# Altium PCB pcb_xl_15cm.PcbDoc
Units mm, origin at the board's own origin, x right, y up, seen from the top; angles counter-clockwise.
Board outline 29 x 150 mm, 2 copper layers (Top Layer, Bottom Layer); 40 components, 37 nets, 146 pads, 46 vias.
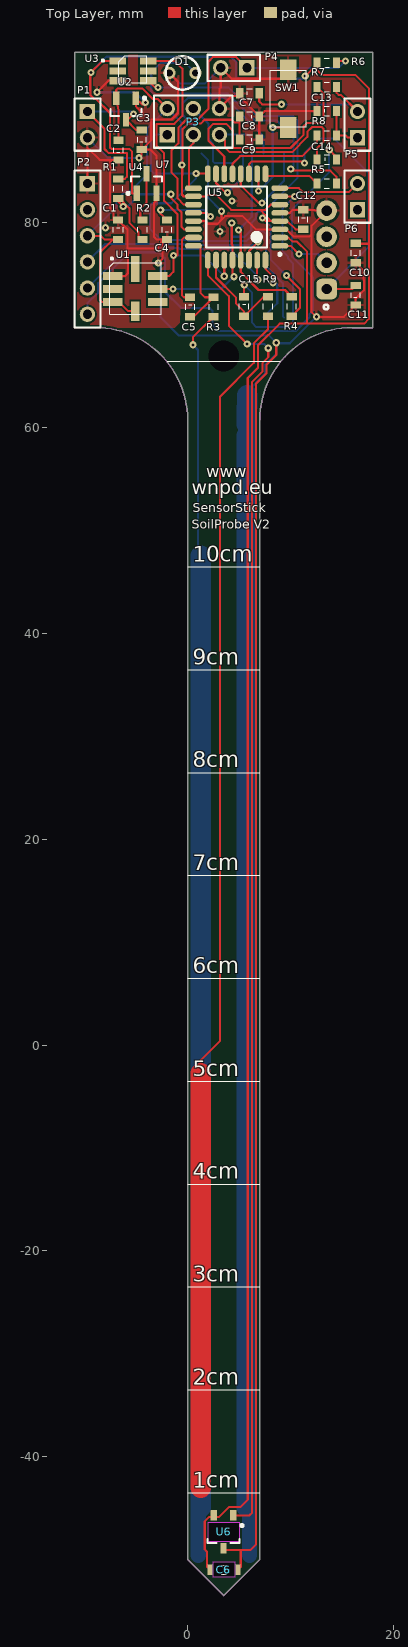
[diagram p0: Top Layer view]
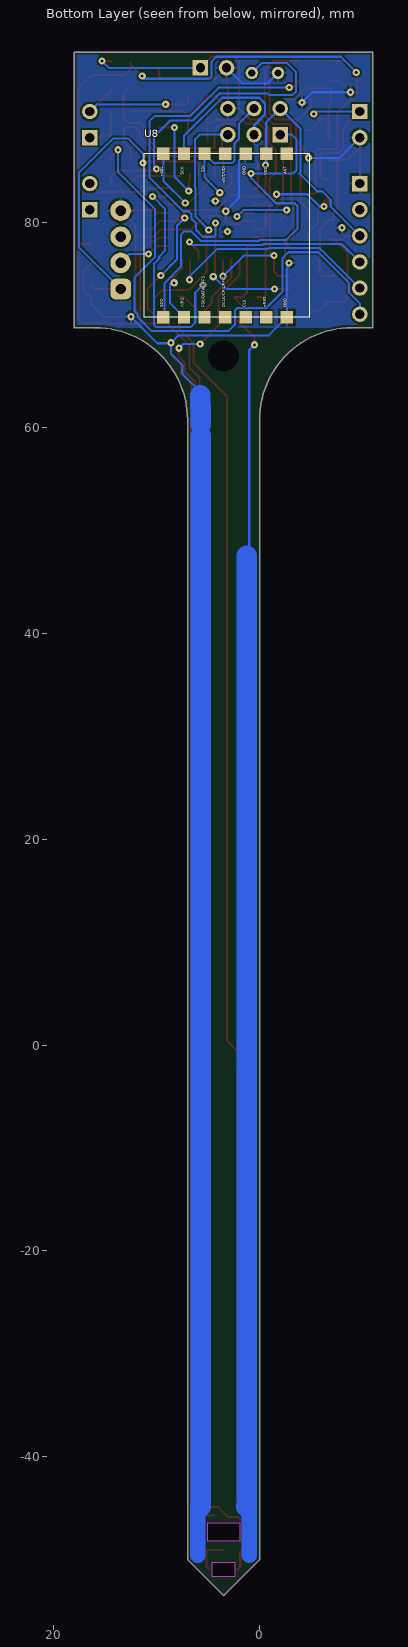
[diagram p1: Bottom Layer view, seen from below]
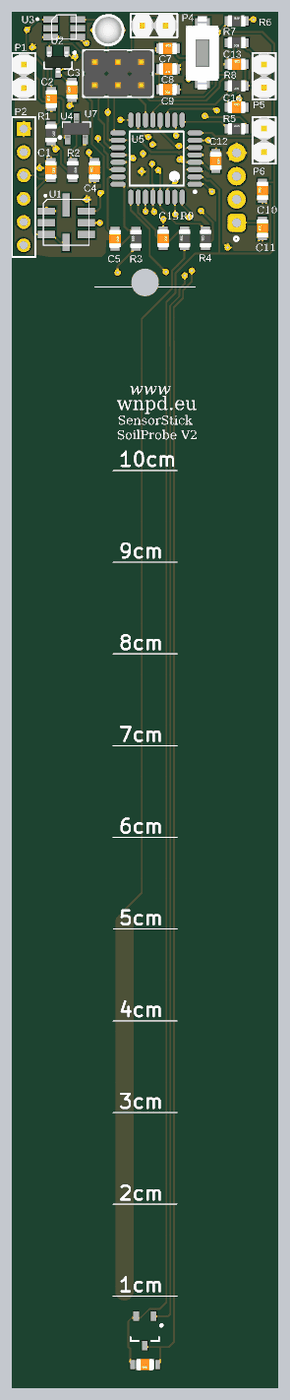
[diagram p2: 3D render of the assembled board from above, using the file's embedded part models]

## Layer stack, top to bottom
Top Layer: signal copper 0.0356
Dielectric: dielectric 0.32, FR-4, Dk 4.8
Bottom Layer: signal copper 0.0356

## Board outline
0,60.75 ccw(c-9,60.75) -9,69.75 -11,69.75 -11,96.5 18,96.5 18,69.75 16,69.75 ccw(c16,60.75) 7,60.75 7,-50 3.5,-53.5 0,-50
cut-out: 2.425,-50.275 2.425,-51.65 4.6,-51.65 4.6,-50.275
cut-out: 1.95,-46.4 1.95,-48.2 5.05,-48.2 5.05,-46.4

## Design rules (kind name [scope] priority, off if disabled: settings)
Clearance "Clearance via" [IsVia vs IsPad] p1: gap=0.5
Clearance Clearance-xPP-xTP-xTT [All] p2: gap=0.2
ComponentClearance [All] p1: gap=0.2 collisioncheckmode=3 verticalgap=0.2 showdistances=FALSE
HoleSize HoleSize-PTH [All] p1: absolutevalues=TRUE maxlimit=4 minlimit=0.25 maxpercent=80.000 minpercent=20.000
HoleToHoleClearance [All] p1: gap=0.15 allowstackedmicrovias=TRUE
Length "Schematic Length Constraint" [InNet('ANTENNA')] p1: maxlimit=164.71 minlimit=164.7
MinimumAnnularRing "Minimum IAR <=0.45mm" [((ObjectKind = 'Pad') OR (ObjectKind = 'Via')) And (Layer = 'MultiLayer') And (HoleDiameter <= AsMM(0.45))] p1: minimumring=0.175 // minimum inner annular ring for pads <= 0.45mm finished hole size
MinimumSolderMaskSliver [All] p1: minsoldermaskwidth=0.1
PolygonConnect [All] p1: connectstyle=Relief reliefconductorwidth=0.254 reliefentries=4 polygonreliefangle="90 Angle" airgapwidth=0.254
RoomDefinition SoilProbe [InComponentClass('SoilProbe')] p1: confinementstyle=ConfineIn formatcopy=TRUE lockcomponents=FALSE outline -27.8,44.75 -12,44.75 -12,49.25 -27.8,49.25
RoomDefinition SensVoltageBatt [InComponentClass('SensVoltageBatt')] p2: confinementstyle=ConfineIn formatcopy=TRUE lockcomponents=FALSE outline 48.3,75.225 61.75,75.225 61.75,82.225 48.3,82.225
RoomDefinition SensorOutput [InComponentClass('SensorOutput')] p3: confinementstyle=ConfineIn formatcopy=TRUE lockcomponents=FALSE outline 19.2,85.775 37.75,85.775 37.75,94.025 19.2,94.025
RoomDefinition SensorLDR [InComponentClass('SensorLDR')] p4: confinementstyle=ConfineIn formatcopy=TRUE lockcomponents=FALSE outline 25.95,110.25 37.7,110.25 37.7,118.5 25.95,118.5
RoomDefinition RFM12B [InComponentClass('RFM12B')] p5: confinementstyle=ConfineIn formatcopy=TRUE lockcomponents=FALSE outline 50.25,53 59.5,53 59.5,72.5 50.25,72.5
RoomDefinition Regulator3v3 [InComponentClass('Regulator3v3')] p6: confinementstyle=ConfineIn formatcopy=TRUE lockcomponents=FALSE outline 8.725,114.2 23.225,114.2 23.225,121.2 8.725,121.2
RoomDefinition ArduinoDownload [InComponentClass('ArduinoDownload')] p7: confinementstyle=ConfineIn formatcopy=TRUE lockcomponents=FALSE outline 40.75,96.42 59,96.42 59,114.92 40.75,114.92
RoutingVias "RoutingVias <= 0.45mm" [All] p1: holewidth=0.25 width=0.7 viastyle="Through Hole" minholewidth=0.25 minwidth=0.6 maxholewidth=0.5 maxwidth=1 // finishet hole size <= 0.45mm
SilkToSilkClearance [All] p1: silktosilkclearance=0.2
SilkToSolderMaskClearance SilkscreenOverComponentPads [IsPad] p1: minsilkscreentomaskgap=0.2 clearancetoexposedcopper=TRUE
SolderMaskExpansion [All] p1: expansion=0.102
Width Width-xTW [All] p1: maxlimit=4 minlimit=0.2 preferedwidth=0.2
22 further rules are at their usual default settings.

## Classes and differential pairs
component class ArduinoDownload: C14 P2
component class Regulator3v3: C2 C3 U2
component class RFM12B: C8 C9 U8
component class SensorLDR: P4 R6
component class SensorOutput: C7 C13 P5 R7 R8
component class SensVoltageBatt: R1 R2 U4
component class SoilProbe: C5 C15 R3 R9

## Components (designator, comment, footprint, x,y, rotation, side; value= is the part's Value field where it differs from the comment)
C1 "100n" C0805#1 -6.75,79.25 r270 top (schematic designator C14)
C2 "1u" C0805#1 -6.75,87 r90 top (schematic designator C10)
C3 "1u" C0805#1 -4.5,88 r90 top (schematic designator C9)
C4 "100n" C0805#1 -2.05,79.25 r90 top (schematic designator C1)
C5 "2n2" C0805#1 0.25,71.75 r270 top (schematic designator C4)
C6 "100n" C0805#2 3.5,-51 r180 top (schematic designator C15)
C7 "100n" C0805#1 6,92.54 r0 top (schematic designator C11)
C8 "10n" C0805#1 6,90.24 r180 top (schematic designator C7)
C9 "220p" C0805#1 6,88 r180 top (schematic designator C6)
C10 "100n" C0805#1 16.3,77 r90 top (schematic designator C13)
C11 "100n" C0805#1 16.3,72.9 r90 top (schematic designator C12)
C12 "100n" C0805#1 11.25,80.25 r270 top (schematic designator C2)
C13 "100n" C0805#1 13.5,90.82 r0 top (schematic designator C8)
C14 "100n" C0805#1 13.5,86.12 r0 top (schematic designator C3)
C15 "2n2" C0805#1 5.5,71.8 r270 top
D1 "LED RED" LED-3mm 0.75,94.5 r180 top
P1 "9vIN" PH1x2_2.54 -9.75,90.75 r270 top (schematic designator P6)
P2 "Arduino Download interface" PH1x6_2.54 -9.75,83.75 r270 top (schematic designator P3)
P3 "ICSP" PH2x3_2.54 -2,88.5 r0 top (schematic designator P7)
P4 "Light sensor (LDR)" PH1x2_2.54 5.75,95 r180 top (schematic designator P1)
P5 "SoilAnalogOutput" PH1x2_2.54 16.5,88.21 r90 top
P6 "Pin Header" PH1x2_2.54 16.5,81.21 r90 top (schematic designator P2)
R1 "RESISTOR" R0805 -6.75,83.25 r270 top (schematic designator R5)
R2 "RESISTOR" R0805 -4.39,79.25 r270 top (schematic designator R6)
R3 "RESISTOR" R0805 2.5,71.75 r90 top (schematic designator R4)
R4 "RESISTOR" R0805 10.1,71.8 r90 top (schematic designator R2)
R5 "RESISTOR" R0805 13.5,83.75 r0 top (schematic designator R1)
R6 "RESISTOR" R0805 13.5,95.5 r0 top (schematic designator R3)
R7 "RESISTOR" R0805 13.5,93.13 r180 top (schematic designator R8)
R8 "RESISTOR" R0805 13.5,88.43 r180 top (schematic designator R7)
R9 "RESISTOR" R0805 7.8,71.8 r90 top
SW1 "Tact. SMT" "Switch TACT 3.5*6" 9.75,87.5 r180 top
U1 "Barometric sensor" BMP085 -5,73.75 r0 top (schematic designator U2)
U2 "MCP1703T" SOT23 -6,91 r270 top (schematic designator U8)
U3 "Luminosity sensor" TSL2561 -4.2,94.725 r0 top (schematic designator U5)
U4 "NMOS FDV303N" SOT-23-FET -4,83.75 r90 top (schematic designator U7)
U5 "ATmega328P-AU" atmel_32A_N 4.75,80.5 r180 top (schematic designator U1)
U6 "Soil temp. sensor" SOT-23-TT3_M 3.475,-47.7 r270 top (schematic designator U4)
U7 "Humidity Sensor" DHTXX 13.5,73.5 r90 top (schematic designator U3)
U8 "RFM12b / 433Mhz" RFM12_dev 11.25,70.75 r90 bottom (schematic designator U6)

## Footprints (in the part's own frame and the unit in brackets; to place one, negate y for a bottom-side part, rotate by r counter-clockwise, add the part's x,y. Pads: shape width x height; smd on the part's side, far side on the other; paste and mask are expansions set on the pad)
atmel_32A_N [mm] "Thin QFP, 32-Leads, Body 7x7mm, Pitch 0.8mm, IPC Medium Density"
  oval 1.65x0.55 smd: 1(-4.2,2.8) 2(-4.2,2) 3(-4.2,1.2) 4(-4.2,0.4) 5(-4.2,-0.4) 6(-4.2,-1.2) 7(-4.2,-2) 8(-4.2,-2.8) 17(4.2,-2.8) 18(4.2,-2) 19(4.2,-1.2) 20(4.2,-0.4) 21(4.2,0.4) 22(4.2,1.2) 23(4.2,2) 24(4.2,2.8)
  oval 0.55x1.65 smd: 9(-2.8,-4.2) 10(-2,-4.2) 11(-1.2,-4.2) 12(-0.4,-4.2) 13(0.4,-4.2) 14(1.2,-4.2) 15(2,-4.2) 16(2.8,-4.2) 25(2.8,4.2) 26(2,4.2) 27(1.2,4.2) 28(0.4,4.2) 29(-0.4,4.2) 30(-1.2,4.2) 31(-2,4.2) 32(-2.8,4.2)
  silkscreen extent -4.33,-2.95 2.95,3.75, body extent -3.5,-3.5 3.5,3.5, height 1.2
BMP085 [mm]
  rect 1.9x0.8 smd: 1(-2.274,1.016) 2(-2.274,-0.254) 3(-2.274,-1.524) 5(2.074,-1.524) 6(2.074,-0.254) 7(2.074,1.016)
  rect 0.8x1.9 smd: 4(-0.1,-2.4)
  rect 0.8x2.5 smd: 8(-0.1,1.7)
  silkscreen extent -2.6,-2.7 2.4,2.77, body extent -2.6,-2.7 2.4,2.3, height 1
C0805#1 [mm] "Chip Capacitor; Body 2.0 x 1.2 mm (LxW typ)"
  rect 0.7x1 smd: 1(-0.95,-0.025) 2(0.95,-0.025)
  silkscreen extent -0.25,-0.48 0.25,0.43, body extent -1,-0.65 1,0.6, height 0.78
C0805#2 [mm] "Chip Capacitor; Body 2.0 x 1.2 mm (LxW typ)"
  rect 0.5x1 smd: 1(-1.375,-0.025) 2(1.35,-0.025)
  silkscreen extent -0.25,-0.48 0.25,0.43, body extent -1,-0.65 1,0.6, height 0.78
DHTXX [mm] "Sensor Humidity & Temperature"
  rrect50% 2x2 hole 1: 1(0,0)
  round 2 hole 1: 2(2.54,0) 3(5.08,0) 4(7.62,0)
  silkscreen extent -1.97,-0.17 -1.53,0.27, body extent -3.4,1.25 10.85,16.75, height 12
LED-3mm [mm]
  round 1.2 hole 0.7: 1(0,0) 2(2.54,0)
  silkscreen extent -0.36,-1.62 2.9,1.62, body extent -0.39,-1.65 2.91,1.64, height 5.51
PH1x2_2.54 [mm] "Connector; Header; 2 Position"
  rect 1.5x1.5 hole 0.9: 1(0,0)
  round 1.5 hole 0.9: 2(2.54,0)
  silkscreen extent -1.27,-1.27 3.81,1.27, body extent -1.27,-1.27 3.81,1.27, height 8.38
PH1x6_2.54 [mm] "Connector; Header; 6 Position"
  rect 1.5x1.5 hole 0.9: 1(0,0)
  round 1.5 hole 0.9: 2(2.54,0) 3(5.08,0) 4(7.62,0) 5(10.16,0) 6(12.7,0)
  silkscreen extent -1.27,-1.27 13.97,1.27
PH2x3_2.54 [mm] "Connector; Header; 3x2 Position"
  rect 1.5x1.5 hole 0.9: 1(0,0)
  round 1.5 hole 0.9: 2(0,2.54) 3(2.54,0) 4(2.54,2.54) 5(5.08,0) 6(5.08,2.54)
  silkscreen extent -1.27,-1.27 6.35,3.81, body extent -1.27,-1.27 6.35,3.81, height 10.1
R0805 [mm] "0805 SMD Resistor"
  rect 0.7x1 smd: 1(-0.95,0) 2(0.95,0)
  silkscreen extent -0.25,-0.45 0.25,0.45, body extent -1.01,-0.63 0.99,0.62, height 0.78
RFM12_dev [mm] "Wireless; Uni. ISM band FSK transceiver  module;"
  rect 1.2x1.2 smd: 1(0,-1.9) 2(0,-3.9) 3(0,-5.9) 4(0,-7.9) 5(0,-9.9) 6(0,-11.9) 7(0,-13.9) 8(15.9,-13.9) 9(15.9,-11.9) 10(15.9,-9.9) 11(15.9,-7.9) 12(15.9,-5.9) 13(15.9,-3.9) 14(15.9,-1.9)
  silkscreen extent 0,-16.1 15.9,0
SOT23 [mm] "SOT23, 3-Leads, Body 2.9x1.3mm, Pitch 0.95mm, Lead Span 2.4mm, IPC Medium Density"
  rect 1.3x0.6 smd: 1(-1.05,0.95) 2(-1.05,-0.95) 3(1.05,0)
  silkscreen extent -1.17,-1.5 0.7,1.93, body extent -1.18,-1.47 1.17,1.45, height 1
SOT-23-FET [mm] "SOT23, 3-Leads, Body 2.9x1.3mm, Pitch 0.95mm, Lead Span 2.5mm, IPC Medium Density"
  rect 1.5x0.6 smd: 1(-0.95,0.95) 2(0.95,0) 3(-0.95,-0.95)
  silkscreen extent -1.07,-1.5 0.7,1.92, body extent -1.25,-1.46 1.23,1.46, height 0.98
SOT-23-TT3_M [mm] "SOT23, 3-Leads, Body 2.9x1.3mm, Pitch 0.95mm, Lead Span 2.4mm, IPC Low Density"
  rect 1x0.6 smd: 1(-2,-0.95) 2(-2,0.95) 3(1.2,0)
  silkscreen extent -1.12,-1.55 0.7,1.93
"Switch TACT 3.5*6" [mm] "Switch, Tactile"
  rect 1.6x2 smd: 1(0,-1.7) 2(0,-7.3)
  silkscreen extent -1.75,-7.25 1.75,-1.75, body extent -1.75,-8.5 1.75,-0.5, height 9
TSL2561 [mm] "Light intensity sensor"
  rect 1.6x0.7 smd: 1(-2.6,0.925) 2(-2.6,-0.025) 3(-2.6,-0.975) 4(0.35,-0.975) 5(0.35,-0.025) 6(0.35,0.925)
  silkscreen extent -4.12,-1.2 0.2,1.45, body extent -2.1,-0.55 -0.13,1.45, height 1

## Part data
D1: library part Red-3mm, "LED, Surface Mount LED Indicator"
P1 P4 P5 P6: library part PH1x2, "Con1x2"
P2: library part PH1x6, "Con1x6"
P3: library part PH2x3, "Header, 3-Pin, Dual row"
R1: library part 100K, "Resistor"
R2 R6: library part 10K, "Resistor"
R3 R4 R7 R8 R9: library part 1K, "Resistor"
R5: library part 560R, "Resistor"
SW1: library part "Pushbutton TACT mini 3.5x6", "Switch"
U1: library part BMP085, "Sensor, Barometric"
U2: library part MCP1703T-3002E/CB, "Regulator, 5v"
U3: library part TSL2561, "Sensor, Illumination"
U4: library part IRLML0100TRPBF, "Transistor"
U5: "8-bit AVR Microcontroller, 32KB Flash, 1KB EEPROM, 2KB SRAM, 32-pin TQFP, Industrial Grade (-40°C to 85°C)"
U6: library part MCP9700AT-E/TT, "Low-Power Linear Active Thermistor IC, 3-Pin SOT-23, Extended Temperature, Tape and Reel"
U7: library part DHT11, "Humidity / Temp Sensor"
U8: library part RFM12b, "Wireless, Transceiver"

## Free pads (board coordinates)
  round 0 hole 3: 3(3.5,67)

## Via types
v1: diameter 0.7, hole 0.3, Top Layer to Bottom Layer, 46 vias

## Nets (pads, with @x,y where several pads share a name; then routed paths per layer and width w, separated by ;. In a path a pad name is that pad's centre, name@x,y a point inside that pad or via, vN(x,y) a via of type N, cw(c..) or ccw(c..) an arc to the next point about the centre after c; other vN are vias at no path point)
3V3: C1.2 C2.2 C8.2 C9.2 C12.2 P2.3 P3.2 R4.1 U1.3 U1.4 U2.2 U5.4 U5.6 U5.18 U8.9 | length 90.5
  Top Layer w0.2: P2.3 -8.451,78.67 -8.081,78.3 -7.282,78.3 ; C1.2 -7.282,78.3 ; C2.2 -6.725,90.869 U2.2 -6.95,92.849 -6.798,93.001 -4.42,93.001 -3.385,91.966 -2.926,91.966 P3.2 ; U1.4 -5.771,71.35 -6.647,72.226 U1.3 -8.298,72.226 -8.527,72.455 -8.527,77.055 -7.282,78.3 ; v1(-0.577,85.557) -0.577,84.554 ; C9.2 5.05,89.704 ; C8.2@5.05,90.275 5.05,89.704 ; v1(7.272,80.4) 7.572,80.1 8.11,80.1 ; U5.6 8.051,81.7 7.551,81.2 7.031,81.2 ; R4.1 10.9,71.65 10.9,73.5 v1(9.6,74.8) ; C12.2 10.485,79.3 9.685,80.1 U5.4 8.11,80.1 ; -0.577,82.748 -0.329,82.5 ; -0.577,82.748 -0.577,82.627 -0.45,82.5 -0.329,82.5 ; -0.577,82.748 -0.577,84.554 ; -0.577,84.554 -0.51,84.62 -0.51,89.027 0.033,89.57 1.25,89.57 1.63,89.95 4.284,89.95 4.53,89.704 5.05,89.704 ; -0.329,82.5 U5.18 1.72,82.5 1.845,82.625 2.801,82.625 4.226,81.2 7.031,81.2 ; 7.031,81.2 7.549,80.672 8.11,80.1 ; v1(9.6,74.8) 9.513,74.713 v1(9.6,74.8)
  Bottom Layer w0.2: P2.3 -6.916,81.504 -6.916,82.168 -6.084,83 -5.597,83 -3.857,84.74 -3.974,84.857 -3.974,89.066 P3.2 -0.65,89.69 U8.9 -0.65,85.63 v1(-0.577,85.557) ; v1(7.272,80.4) 8.025,79.647 8.025,76.375 v1(9.6,74.8) ; v1(9.6,74.8) 9.513,74.713 v1(9.6,74.8)
9V0: C3.2 P1.1 R1.1 U2.3 | length 17.4
  Top Layer w0.2: P1.1 -8.095,89.095 -8.095,87.106 -7.689,86.7 -5.911,86.7 -5.911,84.414 -6.124,84.2 R1.1 ; v1(-5.263,90.522) -5.835,89.95 U2.3 -5,88.95 C3.2
  Bottom Layer w0.2: P1.1 -5.491,90.75 v1(-5.263,90.522)
AN4_SDA: U1.7 U3.6 U5.27 | length 35.7
  Top Layer w0.2: U3.6 -1.251,95.65 -0.526,94.925 -0.526,90.325 -1.301,89.55 -3.05,89.55 -3.05,87.45 -2.294,86.694 -2.294,82.062 -1,80.768 -1,76.743 v1(-1.39,76.743) ; U1.7 -1.796,74.766 -1.4,75.162 v1@-1.4,76.743 ; v1(3.55,74.736) U5.27
  Bottom Layer w0.2: v1(-1.39,76.743) 1.543,76.743 v1(3.55,74.736)
AN5_SCL: U1.6 U3.4 U5.28 | length 45.3
  Top Layer w0.2: U3.4 -3.175,93.075 v1(-2.888,93.075) ; U1.6 v1(-1.445,73.496) ; v1(4.275,79.918) 4.275,77.81 4.35,77.734 U5.28 4.35,74.7 v1(4.5,74.7)
  Bottom Layer w0.2: v1(-2.888,93.075) 3.97,93.075 6.713,90.332 10.193,90.332 10.686,89.839 10.686,84.311 7.434,81.059 6.882,81.059 6.622,80.799 6.622,80.353 6.172,79.903 6.172,79.235 5.519,78.582 4.427,78.582 4.275,78.734 v1(4.275,79.918) ; v1(-1.445,73.496) 3.229,73.496 4.2,74.467
ANTENNA: U8.8
AREF: C4.2 U5.20 | length 8.1
  Top Layer w0.2: v1(-2.634,81.188) -2.634,80.809 C4.2 ; U5.20 1.844,80.9 v1(2.198,80.546)
  Bottom Layer w0.2: v1(-2.634,81.188) 1.556,81.188 v1(2.198,80.546)
BATTVOLT-ANX: R1.2 R2.2 U5.22 | length 16
  Top Layer w0.2: v1(-6.266,81.518) -6.75,82.001 R1.2 -6.622,82.3 -5.682,81.36 -5.682,79.943 -4.768,79.029 -4.768,78.3 R2.2@-4.615,78.3 ; v1(-1.644,82.712) -1.618,82.712 -1.618,82.335 -0.983,81.7 -0.983,81.317 -0.6,80.934 -0.6,79.526 -0.374,79.3 U5.22
  Bottom Layer w0.2: v1(-6.266,81.518) -5.835,81.518 -4.641,82.712 v1(-1.644,82.712)
D10_SS: U5.12 U8.14 | length 9.5
  Top Layer w0.2: U5.12 5.15,83.601 6.877,81.874 v1(7.221,81.874)
  Bottom Layer w0.2: v1(7.221,81.874) 9.35,84.003 U8.14
D11_MOSI: P3.4 U5.15 U8.12 | length 16.1
  Top Layer w0.2: U5.15 2.75,83.804 3.69,82.864 v1(3.868,82.864)
  Bottom Layer w0.2: P3.4 2.014,89.566 2.014,88.081 2.446,87.649 2.446,85.93 2.641,85.734 4.434,85.734 U8.12 5.35,84.346 v1(3.868,82.864)
D12_MISO: P3.1 U5.16 U8.1 | length 39.8
  Top Layer w0.2: v1(0.82,84.718) 1.95,84.718 U5.16
  Bottom Layer w0.2: P3.1 -3.145,88.5 -3.574,88.071 -3.574,85.023 -3.295,84.744 0.795,84.744 v1(0.82,84.718) 0.82,84.251 -1.593,81.838 -3.422,81.838 -3.691,81.569 -3.691,79.374 -2.592,78.275 -0.017,78.275 0.076,78.182 5.722,78.182 6.635,79.095 7.348,79.095 7.625,78.818 7.625,75.694 9.24,74.079 9.24,70.86 U8.1
D13_SCK: P3.3 U5.17 U8.13 | length 20.6
  Top Layer w0.2: P3.3 0.54,87.661 0.137,87.258 0.137,83.3 U5.17
  Bottom Layer w0.2: P3.3 0.54,89.392 -0.526,90.458 -0.526,91.531 0.033,92.09 3.634,92.09 7.35,88.374 U8.13
DHT11_DATA: U5.1 U7.2 | length 5.2
  Top Layer w0.2: U5.1 10,77.7 v1(10.8,76.9)
  Bottom Layer w0.2: v1(10.8,76.9) 12.64,76.9 U7.2
DHT11_ENABLE: C11.2 U5.11 U7.1 | length 31.6
  Top Layer w0.2: U5.11 5.95,85.633 6.228,85.911 11.184,85.911 v1(11.336,85.76) ; U7.1 15.975,73.5 C11.2
  Bottom Layer w0.2: v1(11.336,85.76) 11.336,86.686 12.8,88.15 14.203,88.15 17.559,84.795 17.559,77.559 U7.1
DTR: C14.2 P2.6 | length 51.6
  Top Layer w0.2: v1(13.749,87.03) 14.45,86.329 C14.2
  Bottom Layer w0.2: P2.6 -9.75,72.105 -8.7,73.155 -8.7,74.074 -5.699,77.075 -2.799,77.075 -2.224,76.5 -2.224,76.323 -2.213,76.312 -2.213,73.213 -0.65,71.65 2.15,71.65 2.4,71.4 2.4,70.025 3.025,69.4 10.475,69.4 11.854,70.779 11.854,71.069 12.15,71.365 12.15,74.631 10.15,76.631 10.15,81.247 13.749,84.845 v1(13.749,87.03)
ENABLE_EXT_SENSORS: C6.2 C10.2 R6.1 U3.1 U4.1 U5.2 U6.1 | length 217.9
  Top Layer w0.2: U3.1 -8.3,95.65 v1(-9.4,94.55) -9.475,94.475 -9.475,92.356 -9.094,91.975 -8.925,91.975 -7.562,90.612 -7.562,87.258 -7.403,87.1 -5.657,87.1 -5.428,86.871 -5.428,82.8 U4.1 ; C6.2@2.125,-50.963 1.875,-50.713 1.875,-49.224 1.65,-48.999 1.65,-46.275 2.05,-45.875 3.026,-45.875 4.001,-44.9 5.1,-44.9 5.83,-44.17 5.83,64.855 6.825,65.85 6.825,68.025 8.939,70.139 11.7,70.139 ; U5.2 9.786,78.5 10.186,78.1 10.619,78.1 11.6,77.119 11.6,70.239 11.7,70.139 ; v1(11.412,94.193) R6.1@12.55,95.331 ; R6.1 R6.1@12.55,95.331 ; C10.2 16.375,77.9 17.6,77.9 ; 11.7,70.139 17.139,70.139 17.6,70.6 17.6,77.9 ; R6.1@12.55,95.331 12.55,94.807 13.038,94.32 16.289,94.32 17.6,93.008 17.6,77.9
  Bottom Layer w0.2: v1(-9.4,94.55) -9.4,94.575 -7.903,96.072 4.198,96.072 4.681,95.59 4.681,94.145 4.876,93.95 4.989,93.95 5,93.939 11.209,93.939 11.412,94.142 v1(11.412,94.193)
FU_2: C15.1 U5.7 | length 24.7
  Top Layer w0.2: C15.1 5.475,73.875 v1(5.5,73.9) ; U5.7 v1@10.6,82.5 ; v1(10.4,82.5) v1@10.6,82.5
  Bottom Layer w0.2: v1(5.5,73.9) 6.25,73.15 6.25,70.226 6.676,69.8 10.024,69.8 10.25,70.026 10.25,74.531 10.25,75.965 9.75,76.465 9.75,76.65 9.2,77.2 9.2,81.3 v1(10.4,82.5)
FU_3: P6.2 U5.8 | length 8
  Top Layer w0.2: U5.8 10.802,83.3 11.162,82.94 15.69,82.94 P6.2
GND: C1.1 C2.1 C3.1 C4.1 C6.1 C7.1 C8.1 C9.1 C10.1 C11.1 C12.1 C13.1 D1.2 P1.2 P2.1 P3.6 P4.2 SW1.2 U1.1 U2.1 U3.3 U4.3 U5.3 U5.5 U5.21 U6.3 U7.4 U8.7 U8.10 | length 406.4
  Top Layer w0.2: P2.1 -9.75,85.963 -9.75,87.248 -8.552,86.05 -7.348,86.05 ; v1(-8.825,92.625) -7.7,93.75 U3.3 ; U1.1 -6.063,74.766 -5.809,75.02 -5.809,76.895 -5.86,77.454 ; C2.1 -7.348,86.05 ; v1(-4.75,86.25) -4.475,86.525 C3.1 ; v1(-4.125,91.625) -4.125,91.45 -4.45,91.45 U2.1 -5.05,91.249 -3.777,89.976 ; v1(-2.863,76.032) -2.456,76.438 -2.456,78.3 C4.1@-2.475,78.3 ; D1.2 -0.95,93.66 -0.95,90.605 -1.579,89.976 -3.777,89.976 ; U5.21 1.698,80.1 1.955,79.844 2.902,79.844 3.284,80.225 ; v1(3.284,81.061) 3.284,80.225 ; U6.3@3.475,-49.075 5.1,-49.075 ; C6.1@4.9,-50.963 5.15,-50.713 5.15,-49.125 5.1,-49.075 ; C9.1 C8.1@6.95,90.275 ; v1(8.6,68.275) 8.6,67.084 7.65,66.134 7.65,65.304 6.63,64.284 6.63,60.654 6.65,60.634 6.65,-48.5 6.075,-49.075 5.1,-49.075 ; U5.5 9.913,80.9 10.213,81.2 C12.1 12.301,81.2 12.381,81.12 U7.4 12.047,79.667 12.047,78.826 ; SW1.2 9.75,93.939 4.271,93.939 P4.2 3.21,93.078 3.08,92.948 P3.6 4.305,92.265 5.05,92.265 5.05,92.206 6.95,90.306 C8.1@6.95,90.275 ; C13.1 7.47,90.795 C8.1@6.95,90.275 ; C10.1 17.1,75.275 17.1,74.374 17.125,74.349 17.125,73.376 16.325,72.576 C11.1 15.175,70.8 v1(12.504,70.8) 12.047,71.257 12.047,78.826 ; -7.348,86.05 -7.562,85.836 -7.562,81.289 -7.206,80.934 -7.206,80.2 C1.1 -5.86,79.285 -5.86,77.454 ; -5.86,77.454 -2.914,77.454 C4.1@-2.475,78.3 ; C3.1 -3.625,87.05 -3.05,86.475 U4.3 -3.05,82.102 -3.284,81.868 -3.284,78.587 -2.998,78.3 C4.1@-2.475,78.3 ; C3.1 -3.549,87.976 -3.549,89.748 -3.777,89.976 ; 3.284,80.225 3.641,80.583 5.342,80.583 6.625,79.3 U5.3 9.591,79.3 10.294,78.597 11.818,78.597 12.047,78.826
  Bottom Layer w0.2: P1.2 -7.79,86.25 v1(-4.75,86.25) ; v1(-8.825,92.625) -5.125,92.625 v1(-4.125,91.625) ; v1(-2.863,76.032) -2.65,75.819 U8.7 -0.9,69 7.875,69 v1(8.6,68.275) v1@8.6,68.225 ; D1.2 -0.771,93.481 1.691,93.481 P4.2 ; U8.10 1.986,86.014 1.986,82.358 v1(3.284,81.061) ; 5.775,63.175 5.775,63.525 7.5,65.25 7.5,66.125 8.6,67.225 v1@8.6,68.225 ; v1(12.504,70.8) 9.929,68.225 v1@8.6,68.225
  Bottom Layer w1.5: 6,-49.586 6,-44.903
  Bottom Layer w2: 5.725,59.25 5.725,-44.878 5.75,-44.903 ; 5.725,60.359 5.725,62 5.775,62.05 5.775,63.175
  other v1: 3.125,79.1 -8,79.45 4.3,82.05
"HUMIDITY VOUT": C13.2 P5.1 R8.1 | length 4.5
  Top Layer w0.2: C13.2 R8.1 15.349,88.43 15.569,88.21 P5.1
LDR_ANX: P4.1 R6.2 U5.19 | length 32.7
  Top Layer w0.2: U5.19 -0.374,81.7 -0.977,82.303 -0.977,84.22 -1.574,84.817 -1.574,87.001 -0.91,87.665 -0.91,89.193 -0.127,89.976 0.961,89.976 2.014,91.029 2.014,95.615 2.471,96.072 4.678,96.072 P4.1 ; R6.2 14.45,95.666 v1(15.324,95.666)
  Bottom Layer w0.2: P4.1 14.658,95 v1(15.324,95.666)
LED_RED: R5.1 U5.9 | length 5.4
  Top Layer w0.2: U5.9 7.75,84.5 11.8,84.5 R5.1
NetD1_1: D1.1 R5.2 | length 31.4
  Top Layer w0.2: v1(10.015,85.15) 10.167,84.998 13.866,84.998 14.45,84.414 R5.2
  Bottom Layer w0.2: D1.1 -0.238,95.488 -2.634,95.488 -3.549,94.574 -3.549,92.694 -3.218,92.364 -0.91,92.364 -0.784,92.49 3.894,92.49 6.509,89.875 8.668,89.875 10.269,88.274 10.269,85.404 v1(10.015,85.15)
NetR2_1: R2.1 U4.2 | length 4.8
  Top Layer w0.2: R2.1@-4.615,80.2 -4.615,81.289 -4,81.904 U4.2
PWM_16BITA: R8.2 U5.13 | length 10.7
  Top Layer w0.2: U5.13 4.35,85.658 5.099,86.408 11.145,86.408 12.55,87.812 R8.2
PWM_16BITB: R7.2 U5.14 | length 23.4
  Top Layer w0.2: U5.14 3.55,86.383 2.014,87.919 2.014,89.093 2.471,89.55 3.734,89.55 4.4,88.884 4.4,87.208 9.99,87.208 11.231,88.449 11.231,89.29 11.57,89.63 12.819,89.63 13.215,90.027 13.215,92.465 R7.2
RESET: C14.1 P3.5 R4.2 U5.29 | length 38.7
  Top Layer w0.2: P3.5 3.64,87.94 3.64,87.258 4.09,86.808 10.155,86.808 11.631,88.283 11.631,88.785 12.076,89.23 13.024,89.23 13.2,89.054 13.2,87.806 12.55,87.156 C14.1 ; v1(4.935,79.232) 5.15,79.017 U5.29 5.15,75.169 6.15,74.169 6.15,74.131 6.881,73.4 9.45,73.4 R4.2
  Bottom Layer w0.2: P3.5 5.827,88.5 6.256,88.071 6.256,83.301 6.222,83.267 6.222,80.519 v1(4.935,79.232)
"RFM12 INT": U5.32 U8.2 | length 6.9
  Top Layer w0.2: U5.32 7.55,75.45 8.4,74.6 8.4,74.1 v1(8.3,74.1)
  Bottom Layer w0.2: U8.2 8.7,72.1 8.7,74 8.5,74 8.4,74.1 v1(8.3,74.1)
RS232_RXD_MISO: P2.4 U5.30 | length 19.6
  Top Layer w0.2: U5.30 5.95,77.199 v1(6.815,78.064)
  Bottom Layer w0.2: P2.4 -8.005,77.875 -0.417,77.875 -0.324,77.782 6.533,77.782 v1(6.815,78.064)
RS232_TXD_MOSI: P2.5 U5.31 | length 21.5
  Top Layer w0.2: U5.31 6.75,74.45 v1(6.8,74.4)
  Bottom Layer w0.2: P2.5 -5.865,77.475 -0.847,77.475 -0.75,77.378 4.144,77.378 6.8,74.721 v1(6.8,74.4)
SENSOR1: R3.1 | length 121.5
  Top Layer w0.2: v1(0.5,68.075) 0.5,68.8 R3.1
  Bottom Layer w0.2: v1(0.5,68.075) 1,67.575 1,47.574
  Bottom Layer w1.5: 1,-49.586 1,-44.903
  Bottom Layer w2: 1.25,47.574 1.25,-44.903 1.274,-44.878
SENSOR2: R9.1 | length 116.6
  Top Layer w0.2: 1.25,-2.75 1.25,-1.45 3.15,0.45 3.15,63.05 6.425,66.325 6.425,68.225 7.8,69.6 R9.1
  Top Layer w2: 1.25,-43 1.25,-2.75
"SOIL MOISURE VOUT": C7.2 P5.2 R7.1 | length 13.9
  Top Layer w0.2: C7.2@6.95,92.265 6.95,91.729 7.229,91.449 v1(9.126,91.449) ; R7.1 14.45,92.577 14.663,92.364 14.886,92.364 P5.2
  Bottom Layer w0.2: v1(9.126,91.449) 15.801,91.449 P5.2
SOIL_AN0: C5.1 U5.23 | length 7.5
  Top Layer w0.2: C5.1 -0.374,72.7 -0.577,72.903 -0.577,78.297 -0.374,78.5 U5.23
SOIL_AN1: C5.2 R3.2 U5.24 | length 9.8
  Top Layer w0.2: C5.2 0.6,70.8 R3.2 1.658,72.7 1.227,73.132 1.227,77.7 U5.24
SOIL_AN2: C15.2 R9.2 U5.26 | length 9.7
  Top Layer w0.2: U5.26 2.75,74.616 4.675,72.691 4.675,72.1 5.475,71.3 C15.2 7.375,72.75 R9.2
SW1: SW1.1 U5.10 | length 10
  Top Layer w0.2: U5.10 6.75,84.16 6.891,84.019 v1(6.891,83.017) ; v1(8.262,89.189) 9.75,89.189 SW1.1
  Bottom Layer w0.2: v1(6.891,83.017) 8.262,84.388 v1(8.262,89.189)
"TEMP SENSOR ANALOG": U5.25 U6.2 | length 127.7
  Top Layer w0.2: U5.25 1.95,74.85 4,72.8 4,69.925 v1(5.775,68.15) ; U6.2 6,-45.7 6.25,-45.45 6.25,60 6.23,60.02 6.23,64.45 7.25,65.47 7.25,66.3 7.825,66.875 v1(7.825,67.75)
  Bottom Layer w0.2: v1(5.775,68.15) 7.425,68.15 v1(7.825,67.75)
pads on no net: P2.2 P6.1 U1.2 U1.5 U1.8 U3.2 U3.5 U7.3 U8.3 U8.4 U8.5 U8.6 U8.11

## Polygon pours and split planes (outlines as drawn)
GND on Top Layer "Bottom Layer-No Net" (solid, remove dead copper, pour order 4): -11,69.75 18,69.75 18,96.5 -11,96.5
GND on Bottom Layer "Bottom Layer-No Net" (solid, remove dead copper, pour order 2): -11,69.75 18,69.75 18,96.5 -11,96.5

## Keep-outs
Keep-Out Layer:
  the board outline again, w0.1

## Other copper
Top Layer:
  pour cut-out: -0.75,71.575 0.175,71.575 1.85,73.25 3.059,73.25 3.35,72.959 3.35,69.95 1.5,68.1 1.5,68 -0.525,68 -0.65,68.125 -2,68.125 -2,69 -0.8,70.2

## Silkscreen, mask and mechanical layers (free items; w line width, h text height)
Top Overlay:
  lines w0.1: -2,66.5 9,66.5 ; 0,-43.5 7,-43.5 ; 0,-33.5 7,-33.5 ; 0,-23.5 7,-23.5 ; 0,-13.5 7,-13.5 ; 0,-3.5 7,-3.5 ; 0,6.5 7,6.5 ; 0,16.5 7,16.5 ; 0,26.5 7,26.5 ; 0,36.5 7,36.5 ; 0,46.5 7,46.5
  text "www" at 1.8,54.8 h2
  text "wnpd.eu" at 0.4,53.1 h2.3
  text "SensorStick" at 0.5,51.5 h1.52
  text "SoilProbe V2" at 0.4,49.9 h1.52
  text "10cm" at 0.5,47 h1.52
  text "9cm" at 0.5,37 h1.52
  text "8cm" at 0.5,27 h1.52
  text "7cm" at 0.5,17 h1.52
  text "6cm" at 0.5,7 h1.52
  text "5cm" at 0.5,-3 h1.52
  text "4cm" at 0.5,-13 h1.52
  text "3cm" at 0.5,-23 h1.52
  text "2cm" at 0.5,-33 h1.52
  text "1cm" at 0.5,-43 h1.52
Mechanical 30:
  lines w0.1: 1.95,-48.2 5.05,-48.2 5.05,-46.4 1.95,-46.4 1.95,-48.2 ; 2.425,-51.65 4.6,-51.65 4.6,-50.275 2.425,-50.275 2.425,-51.65

## Text inside footprints (layer, text, board x,y; h text height)
U8: Bottom Overlay "nSEL" at 9.25,84.471 h0.5 r270; Bottom Overlay "SCK" at 7.25,84.62 h0.5 r270; Bottom Overlay "SDI" at 5.25,84.834 h0.5 r270; Bottom Overlay "nINT/VDI" at 3.25,83.75 h0.5 r270; Bottom Overlay "GND" at 1.25,84.572 h0.5 r270; Bottom Overlay "VDD" at -0.85,84.55 h0.5 r270; Bottom Overlay "ANT" at -2.75,84.633 h0.5 r270; Bottom Overlay "GND" at -2.75,71.75 h0.5 r270; Bottom Overlay "nRES" at -0.75,71.75 h0.5 r270; Bottom Overlay "CLK" at 1.25,71.75 h0.5 r270; Bottom Overlay "DCLK/CFIL/FFIT" at 3.25,71.75 h0.5 r270; Bottom Overlay "FSK/DATA/nFFS" at 5.25,71.75 h0.5 r270; Bottom Overlay "nIRQ" at 7.25,71.75 h0.5 r270; Bottom Overlay "SDO" at 9.25,71.75 h0.5 r270